# Altium PCB Pathfinder.PcbDoc
Units mil, origin at the board's own origin, x right, y up, seen from the top; angles counter-clockwise.
Board outline 2658.54 x 3055 mil, 2 copper layers (Top Layer, Bottom Layer); 99 components, 52 nets, 252 pads, 164 vias.
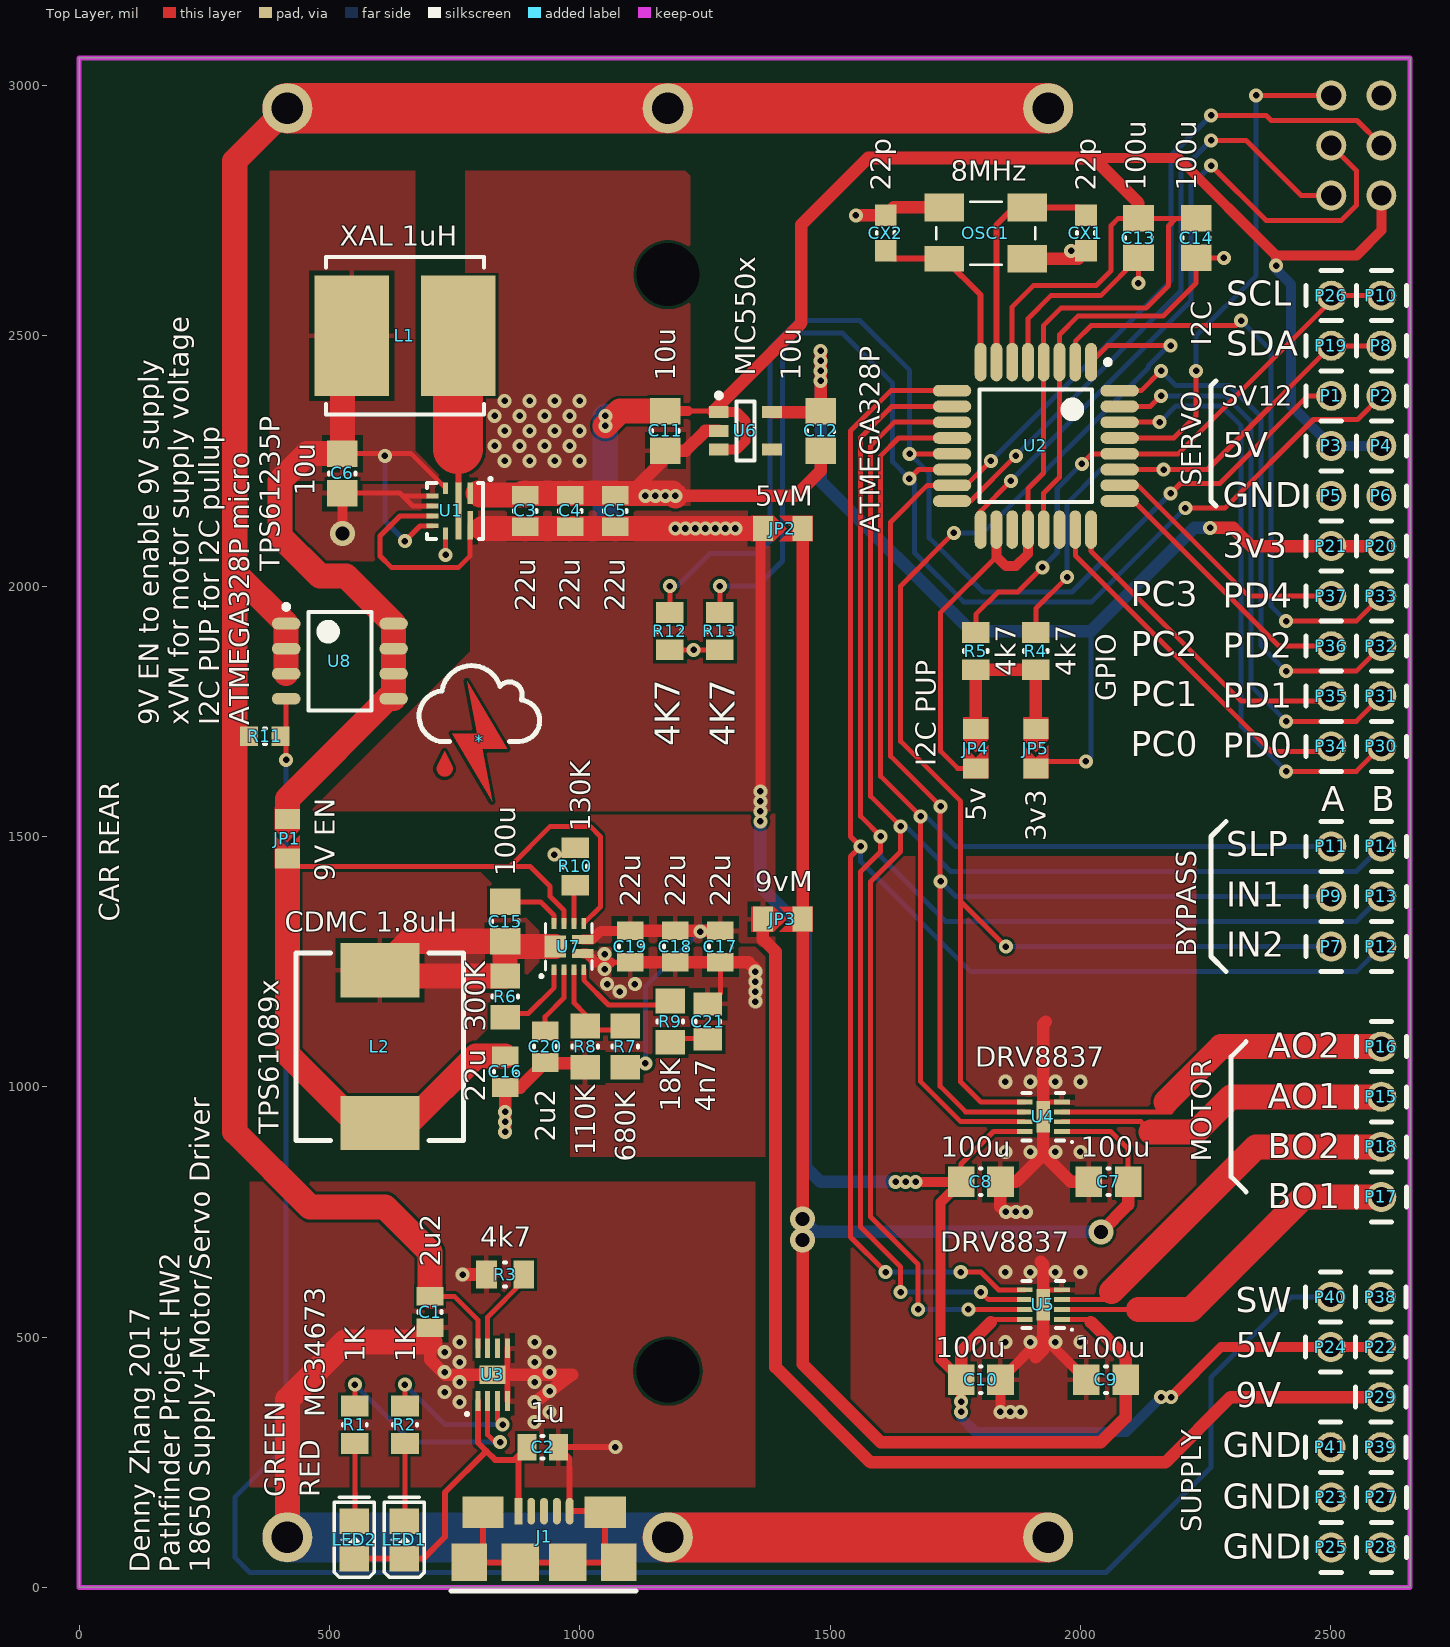
[diagram p0: Top Layer view]
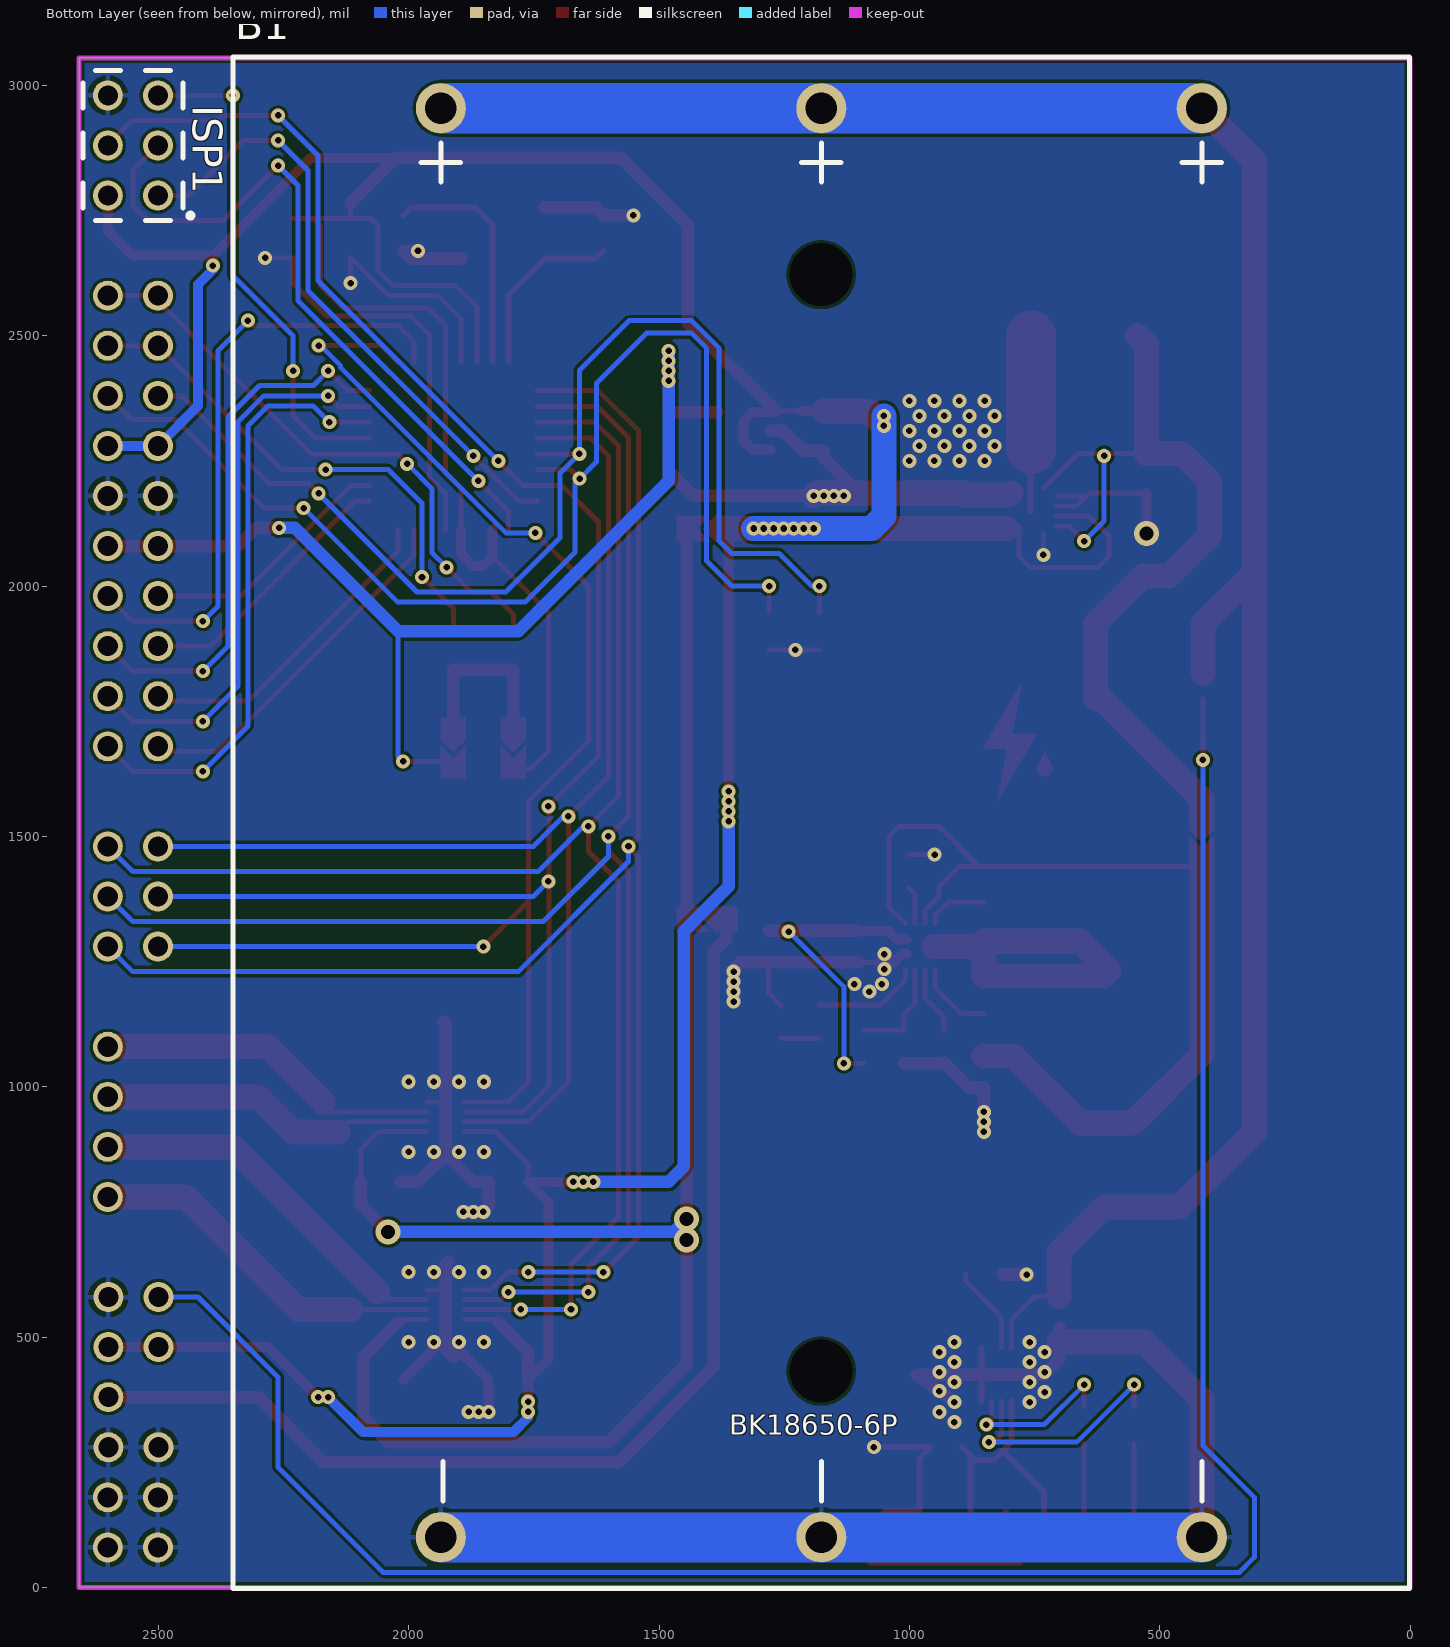
[diagram p1: Bottom Layer view, seen from below]

## Layer stack, top to bottom
Top Solder: solder mask 0.4, Solder Resist, Dk 3.5
Top Layer: signal copper 1.4
Dielectric 1: dielectric 12.6, FR-4, Dk 4.8
Bottom Layer: signal copper 1.4
Bottom Solder: solder mask 0.4, Solder Resist, Dk 3.5

## Board outline
0,0 2658.54,0 2658.54,3055 0,3055

## Design rules (kind name [scope] priority, off if disabled: settings)
Clearance [All] p1: gap=6
PolygonConnect [ispoly vs isvia] p1: connectstyle=Direct reliefconductorwidth=10 reliefentries=4 polygonreliefangle="90 Angle" airgapwidth=10
PolygonConnect PolygonConnect_1 [All] p2: connectstyle=Relief reliefconductorwidth=10 reliefentries=4 polygonreliefangle="90 Angle" airgapwidth=10
RoutingVias [All] p1: holewidth=28 width=50 viastyle="Through Hole" minholewidth=13 minwidth=28 maxholewidth=28 maxwidth=50
SolderMaskExpansion [All] p1: expansion=4
Width [All] p1: maxlimit=100 minlimit=6 preferedwidth=10
30 further rules are at their usual default settings.

## Components (designator, comment, footprint, x,y, rotation, side; value= is the part's Value field where it differs from the comment)
* "Logo" "Zap Cloud" 800,1690 r0 top
B1 "18650 Holder 3Cell" 18650-3Cell 1175.91,1527.17 r270 bottom
C1 "2.2uF" CAPC0805(2012)100_L 701.06,550 r90 top
C2 "1uF" CAPC0805(2012)100_L 926.06,280 r180 top
C3 "22uF" CAPC0805(2012)100_L 891.06,2150 r270 top
C4 "22uF" CAPC0805(2012)100_L 981.06,2150 r270 top
C5 "22uF" CAPC0805(2012)100_L 1071.06,2150 r270 top
C6 "10uF" CAPC0805(2012)145_M 526.06,2225 r90 top
C7 "100nF" CAPC0805(2012)100_M 2056.06,810 r0 top
C8 "100nF" CAPC0805(2012)100_M 1801.06,810 r180 top
C9 "100nF" CAPC0805(2012)100_M 2051.06,415 r0 top
C10 "100nF" CAPC0805(2012)100_M 1801.06,415 r180 top
C11 "10uF" CAPC0805(2012)145_M 1171.06,2310 r90 top
C12 "10uF" CAPC0805(2012)145_M 1481.06,2310 r90 top
C13 "100nF" CAPC0805(2012)100_M 2116.06,2695 r90 top
C14 "100nF" CAPC0805(2012)100_M 2231.06,2695 r90 top
C15 "100nF" CAPC0805(2012)100_M 851.06,1330 r270 top
C16 "22uF" CAPC0805(2012)100_L 851.06,1030 r90 top
C17 "22uF" CAPC0805(2012)100_L 1281.06,1280 r90 top
C18 "22uF" CAPC0805(2012)100_L 1191.06,1280 r90 top
C19 "22uF" CAPC0805(2012)100_L 1101.06,1280 r90 top
C20 "CAP 2.2uF 16V 0805(2012)" CAPC0805(2012)145_L 931.06,1080 r90 top
C21 "4.7nF" CAPC0805(2012)145_N 1256.06,1130 r270 top
CX1 "CAP 22pF 10V 0603(1608)" CAPC0603(1608)100_M 2011.06,2705 r90 top
CX2 "CAP 22pF 10V 0603(1608)" CAPC0603(1608)100_M 1611.06,2705 r270 top
ISP1 "AVRISP" "2x3 100mil Header" 2501.06,2780 r90 bottom
J1 "USB micro B" "USB Micro SMD" 928.82,50 r0 top
JP1 "SolderJumper" bridge 416.06,1500 r270 top
JP2 "SolderJumper" bridge 1401.06,2115 r0 top
JP3 "SolderJumper" bridge 1401.06,1335 r0 top
JP4 "SolderJumper" bridge 1791.06,1680 r270 top
JP5 "SolderJumper" bridge 1911.06,1680 r270 top
L1 "Inductor" XAL7030-102ME 651.06,2500 r0 top
L2 "Inductor" CDMC8D28NP-1R8MC 601.06,1080 r90 top
LED1 "LED2" LED0805 650,95 r90 top
LED2 "LED2" LED0805 550,95 r90 top
OSC1 "ABM3B" ABM3B 1811.06,2705 r180 top
P1 "SV1" "Pin 100mil" 2501.06,2380 r0 top
P2 "SV2" "Pin 100mil" 2601.06,2380 r0 top
P3 "5V" "Pin 100mil" 2501.06,2280 r0 top
P4 "5V" "Pin 100mil" 2601.06,2280 r0 top
P5 "GND" "Pin 100mil" 2501.06,2180 r0 top
P6 "GND" "Pin 100mil" 2601.06,2180 r0 top
P7 "Ain2" "Pin 100mil" 2501.06,1280 r180 top
P8 "SDA" "Pin 100mil" 2601.06,2480 r180 top
P9 "Ain1" "Pin 100mil" 2501.06,1380 r180 top
P10 "SCL" "Pin 100mil" 2601.06,2580 r180 top
P11 "ASLP" "Pin 100mil" 2501.06,1480 r180 top
P12 "Bin2" "Pin 100mil" 2601.06,1280 r180 top
P13 "Bin1" "Pin 100mil" 2601.06,1380 r180 top
P14 "BSLP" "Pin 100mil" 2601.06,1480 r180 top
P15 "AO1" "Pin 100mil" 2601.06,980 r180 top
P16 "AO2" "Pin 100mil" 2601.06,1080 r180 top
P17 "BO1" "Pin 100mil" 2601.06,780 r180 top
P18 "BO2" "Pin 100mil" 2601.06,880 r180 top
P19 "SDA" "Pin 100mil" 2501.06,2480 r180 top
P20 "3v3" "Pin 100mil" 2601.06,2080 r180 top
P21 "3v3" "Pin 100mil" 2501.06,2080 r180 top
P22 "5V" "Pin 100mil" 2600,480 r180 top
P23 "GND" "Pin 100mil" 2501.06,180 r180 top
P24 "5V" "Pin 100mil" 2500,480 r180 top
P25 "GND" "Pin 100mil" 2501.06,80 r180 top
P26 "SCL" "Pin 100mil" 2501.06,2580 r180 top
P27 "GND" "Pin 100mil" 2601.06,180 r180 top
P28 "GND" "Pin 100mil" 2601.06,80 r180 top
P29 "9V" "Pin 100mil" 2600,380 r180 top
P30 "PD0" "Pin 100mil" 2601.06,1680 r180 top
P31 "PD1" "Pin 100mil" 2601.06,1780 r180 top
P32 "PD2" "Pin 100mil" 2601.06,1880 r180 top
P33 "PD4" "Pin 100mil" 2601.06,1980 r180 top
P34 "PC0" "Pin 100mil" 2501.06,1680 r180 top
P35 "PC1" "Pin 100mil" 2501.06,1780 r180 top
P36 "PC2" "Pin 100mil" 2501.06,1880 r180 top
P37 "PC3" "Pin 100mil" 2501.06,1980 r180 top
P38 "SDA" "Pin 100mil" 2600,580 r180 top
P39 "GND" "Pin 100mil" 2600,280 r180 top
P40 "SDA" "Pin 100mil" 2500,580 r180 top
P41 "GND" "Pin 100mil" 2500,280 r180 top
R1 "1K" RESC0805(2012)_N 551.06,325 r270 top
R2 "1K" RESC0805(2012)_N 651.06,325 r270 top
R3 "4K7" RESC0805(2012)_N 851.06,625 r0 top
R4 "4K7" RESC0805(2012)_N 1911.06,1870 r270 top
R5 "4K7" RESC0805(2012)_N 1791.06,1870 r270 top
R6 "300K" RESC0805(2012)_M 851.06,1180 r90 top
R7 "680K" RESC0805(2012)_M 1091.06,1080 r270 top
R8 "110K" RESC0805(2012)_M 1011.06,1080 r90 top
R9 "18K" RESC0805(2012)_M 1181.06,1130 r90 top
R10 "130K" RESC0805(2012)_N 991.06,1440 r270 top
R11 "10K" RESC0603(1608)_N 371.06,1700 r180 top
R12 "4K7" RESC0805(2012)_N 1180,1910 r90 top
R13 "4K7" RESC0805(2012)_N 1280,1910 r90 top
U1 "TPS61235P" VQFN-HR-TPS61235PRWLR 751.06,2150 r270 top
U2 "ATmega328P-ANR" 32A_M 1911.06,2280 r270 top
U3 "MC34673" "UDFN-8 2 x 3 x 0.65" 826.06,425 r90 top
U4 "DRV8837" WSON-8 1926.06,940 r180 top
U5 "DRV8837" WSON-8 1926.06,565 r180 top
U6 "MIC550x" SOT-23-5 1331.06,2310 r0 top
U7 "TPS61089x" "VQFN-11 2 x 2.5" 978.62,1280 r90 top
U8 "P-MOS" SOIC-8-MOSFET 521.06,1850 r0 top

## Footprints (in the part's own frame and the unit in brackets; to place one, negate y for a bottom-side part, rotate by r counter-clockwise, add the part's x,y. Pads: shape width x height; smd on the part's side, far side on the other; paste and mask are expansions set on the pad)
"2x3 100mil Header" [mil]
  round 60 hole 40: 1(0,0) 2(0,100) 3(100,0) 4(100,100) 5(200,0) 6(200,100)
  silkscreen extent -50,-70 250,150
32A_M [mm] "Thin QFP, 32-Leads, Body 7x7mm, Pitch 0.8mm, IPC Low Density"
  oval 1.95x0.6 smd: 1(-4.25,2.8) 2(-4.25,2) 3(-4.25,1.2) 4(-4.25,0.4) 5(-4.25,-0.4) 6(-4.25,-1.2) 7(-4.25,-2) 8(-4.25,-2.8) 17(4.25,-2.8) 18(4.25,-2) 19(4.25,-1.2) 20(4.25,-0.4) 21(4.25,0.4) 22(4.25,1.2) 23(4.25,2) 24(4.25,2.8)
  oval 0.6x1.95 smd: 9(-2.8,-4.25) 10(-2,-4.25) 11(-1.2,-4.25) 12(-0.4,-4.25) 13(0.4,-4.25) 14(1.2,-4.25) 15(2,-4.25) 16(2.8,-4.25) 25(2.8,4.25) 26(2,4.25) 27(1.2,4.25) 28(0.4,4.25) 29(-0.4,4.25) 30(-1.2,4.25) 31(-2,4.25) 32(-2.8,4.25)
  silkscreen extent -4.37,-2.85 2.85,3.78, body extent -3.5,-3.5 3.5,3.5, height 1.2
18650-3Cell [mm] "BK-18650-PC6"
  round 2.54 hole 1.6: 1(-36.25,19.3) 2(36.25,19.3) 3(-36.25,0) 4(36.25,0) 5(-36.25,-19.3) 6(36.25,-19.3)
  silkscreen extent -38.85,-29.85 38.85,29.84
ABM3B [mm]
  rect 2x1.4 smd: GND(-2.1,1.3) GND(2.1,-1.3) OSC1(-2.1,-1.3)
  rect 2x1.3 smd: OSC2(2.1,1.3)
  silkscreen extent -2.5,-1.6 2.5,1.6, body extent -2.5,-1.6 2.5,1.6, height 1.1
bridge [mil]
  rect 40x50 smd: 1(-35,0) 2(44,0)
  Top Layer region: -2,-25 23,0 -2,25 64,25 64,-25
  Top Layer region: -58,-25 -13,-25 12,0 -13,25 -58,25
CAPC0603(1608)100_M [mm] "Chip Capacitor, Body 1.6x0.8mm, Height 1.0mm, IPC Low Density"
  rect 1.1x1.1 smd: 1(-0.9,0) 2(0.9,0)
  silkscreen extent -0.05,-0.45 0.05,0.45, body extent -0.87,-0.47 0.88,0.48, height 1
CAPC0805(2012)100_L [mm] "Chip Capacitor, Body 2.0x1.2mm, Height 1.0mm, IPC High Density"
  rect 0.95x1.35 smd: 1(-0.8,0) 2(0.8,0)
  silkscreen extent -0.05,-0.58 0.05,0.58, body extent -1.1,-0.72 1.1,0.72, height 1
CAPC0805(2012)100_M [mm] "Chip Capacitor, Body 2.0x1.2mm, Height 1.0mm, IPC Low Density"
  rect 1.35x1.55 smd: 1(-1,0) 2(1,0)
  silkscreen extent -0.05,-0.67 0.05,0.67, body extent -1.1,-0.72 1.1,0.72, height 1
CAPC0805(2012)145_L [mm] "Chip Capacitor, Body 2.0x1.2mm, Height 1.45mm, IPC High Density"
  rect 0.95x1.35 smd: 1(-0.8,0) 2(0.8,0)
  silkscreen extent -0.05,-0.58 0.05,0.58, body extent -1.1,-0.72 1.1,0.72, height 1.45
CAPC0805(2012)145_M [mm] "Chip Capacitor, Body 2.0x1.2mm, Height 1.45mm, IPC Low Density"
  rect 1.35x1.55 smd: 1(-1,0) 2(1,0)
  silkscreen extent -0.05,-0.67 0.05,0.67, body extent -1.1,-0.72 1.1,0.72, height 1.45
CAPC0805(2012)145_N [mm] "Chip Capacitor, Body 2.0x1.2mm, Height 1.45mm, IPC Medium Density"
  rect 1.15x1.45 smd: 1(-0.9,0) 2(0.9,0)
  silkscreen extent -0.05,-0.62 0.05,0.63, body extent -1.1,-0.72 1.1,0.73, height 1.45
CDMC8D28NP-1R8MC [mm] "CDMC8D28NP-1R8MC inductor"
  rect 2.75x4 smd: 1(-3.875,0) 2(3.875,0)
  silkscreen extent -4.75,-4.25 4.75,4.25, body extent -4.75,-4.25 4.75,4.25, height 3
LED0805 [mm]
  rect 1.3x1.5 smd: 1(-0.95,0) 2(0.95,0)
  silkscreen extent -1.91,-1.02 2.16,1.02, body extent -1.03,-0.45 1.03,0.46, height 0.85
"Pin 100mil" [mil]
  round 60 hole 40.16: 0(0,0)
  silkscreen extent -50,-50 50,50
RESC0603(1608)_N [mm] "Chip Resistor, Body 1.6x0.8mm, IPC Medium Density"
  rect 0.9x1 smd: 1(-0.8,0) 2(0.8,0)
  silkscreen extent -0.05,-0.4 0.05,0.4, body extent -0.85,-0.47 0.85,0.47, height 0.6
RESC0805(2012)_M [mm] "Chip Resistor, Body 2.0x1.3mm, IPC Low Density"
  rect 1.25x1.5 smd: 1(-1.05,0) 2(1.05,0)
  silkscreen extent -0.05,-0.65 0.05,0.65, body extent -1.1,-0.67 1.1,0.67, height 0.7
RESC0805(2012)_N [mm] "Chip Resistor, Body 2.0x1.3mm, IPC Medium Density"
  rect 1.05x1.4 smd: 1(-0.95,0) 2(0.95,0)
  silkscreen extent -0.05,-0.6 0.05,0.6, body extent -1.1,-0.67 1.1,0.68, height 0.7
SOIC-8-MOSFET [mm] "SOIC, 8-Leads, Body 4.90x3.90mm, Pitch 1.27mm, IPC Medium Density"
  oval 1.45x0.6 smd: D(2.725,-1.905) D(2.725,-0.635) D(2.725,0.635) D(2.725,1.905) G(-2.725,-1.905) S(-2.725,-0.635) S(-2.725,0.635) S(-2.725,1.905)
  silkscreen extent -2.85,-2.5 1.6,2.88, body extent -2,-2.5 2,2.5, height 1.75
SOT-23-5 [mm] "SOT23, 5-Leads, Body 2.90x2.80mm, Pitch 0.95mm, IPC Medium Density"
  rect 1x0.6 smd: 1(-1.35,0.95) 2(-1.35,0) 3(-1.35,-0.95) 4(1.35,-0.95) 5(1.35,0.95)
  silkscreen extent -1.47,-1.5 0.45,1.92, body extent -0.85,-1.5 0.85,1.5, height 1.45
"UDFN-8 2 x 3 x 0.65" [mm] "SON, 8-Leads, Body 2.00x3.00mm, Pitch 0.50mm, Thermal Pad 1.33x0.93mm, IPC Medium Density"
  rect 1x0.25 smd: 1(-1.34,0.75) 2(-1.34,0.25) 3(-1.34,-0.25) 4(-1.34,-0.75) 5(1.34,-0.75) 6(1.34,-0.25) 7(1.34,0.25) 8(1.34,0.75)
  rect 0.93x1.33 smd: 9(0,0)
  silkscreen extent -2.05,1.25 -1.95,1.35, body extent -1.5,-1 1.5,1, height 0.65
"USB Micro SMD" [mm] "Amphenol FCI 10118192-0001LF"
  rect 1.8x1.9 smd: 0(-3.8,0) 0(3.8,0)
  rect 2.1x1.6 smd: 0(-3.1,2.55) 0(3.1,2.55)
  rect 1.9x1.9 smd: 0(-1.2,0) 0(1.2,0)
  rect 0.4x1.35 smd: 1(-1.3,2.6)
  oval 0.4x1.35 smd: 2(-0.65,2.6) 3(0,2.6) 4(0.65,2.6) 5(1.3,2.6)
  silkscreen extent -4.72,-1.45 4.67,-1.45, body extent -4.1,-2.58 4.1,2.85, height 3
"VQFN-11 2 x 2.5" [mm] "tps61089x"
  rect 0.55x0.25 smd mask+0.05: 1(-1.175,0.75) 2(-1.175,0.25) 3(-1.175,-0.25) 4(-1.175,-0.75) 7(1.175,-0.75) 8(1.175,-0.25) 9(1.175,0.25) 10(1.175,0.75)
  rect 0.45x1.1 smd mask-0.05: 5(-0.35,-0.7) 6(0.35,-0.7)
  rect 1.1x1.1 smd mask-0.05: 11(0,0.7)
  silkscreen extent -1.55,-1.17 1.17,1.45, body extent -1.25,-1 1.25,1, height 1
VQFN-HR-TPS61235PRWLR [mm]
  rect 1.1x0.3 smd: 1(-0.9,0.77)
  rect 2.9x0.3 smd: 2(0,0.17)
  rect 0.6x0.25 smd: 3(-1.15,-0.475) 8(1.15,-0.475)
  rect 0.25x0.6 smd: 4(-0.75,-1.15) 5(-0.25,-1.15) 6(0.25,-1.15) 7(0.75,-1.15)
  rect 1.45x0.3 smd: 9(0.725,0.77)
  silkscreen extent -1.67,-1.43 1.43,1.85, body extent -1.25,-1.25 1.25,1.25, height 1
WSON-8 [mm] "SON, 8-Leads, Body 2.00x2.00mm, Pitch 0.50mm, Thermal Pad 1.60x0.69mm, IPC Medium Density"
  rect 0.8x0.25 smd: 1(-0.945,0.75) 2(-0.945,0.25) 3(-0.945,-0.25) 4(-0.945,-0.75) 5(0.945,-0.75) 6(0.945,-0.25) 7(0.945,0.25) 8(0.945,0.75)
  rect 0.69x1.6 smd: 9(0,0)
  silkscreen extent -1.5,-1.2 1.05,1.32, body extent -1.05,-1.05 1.05,1.05, height 0.8
XAL7030-102ME [mm] "Precision Wire Wound Inductor, 2-Leads, Body 7.50x7.50mm, IPC Medium Density"
  rect 3.8x6.1 smd: 1(-2.7,0) 2(2.7,0)
  silkscreen extent -4,-4 4,4, body extent -4,-4 4,4, height 3.1
"Zap Cloud" [mil]
  Top Layer region: -70,-20 -55,-49 -54,-53 -54,-57 -55,-60 -57,-64 -61,-68 -65,-70 -70,-71 -75,-70 -79,-68 -83,-64 -85,-60 -86,-57 -86,-53 -85,-49
  Top Layer region: -25,120 55,-15 5,-15 25,-120 -55,15 -5,15
  silkscreen extent -121,0 120,151

## Part data
B1: library part BK18650-3Cell, "BK-18650-PC6"
C1: library part CMP-1036-04832-1, "CAP 2.2uF 16V ±10% 0805 (2012 Metric) Thickness 1mm SMD"
C2: library part CMP-1036-04749-1, "CAP 1uF 16V ±20% 0805 (2012 Metric) Thickness 1mm SMD"
C3 C4 C5 C16 C17 C18 C19: library part CMP-1036-04944-1, "CAP 22uF 10V ±20% 0805 (2012 Metric) Thickness 1mm SMD"
C6 C11 C12: library part CMP-1036-04926-1, "CAP 10uF 10V -20% to +80% 0805 (2012 Metric) Thickness 1.45mm SMD"
C7 C8 C9 C10 C13 C14 C15: library part CMP-1036-04394-1, "CAP 100nF 10V ±10% 0805 (2012 Metric) Thickness 1mm SMD"
C20: library part CMP-1036-04831-1, "CAP 2.2uF 16V ±10% 0805 (2012 Metric) Thickness 1.45mm SMD"
C21: library part CMP-1036-03558-1, "CAP 4.7nF 16V ±1% 0805 (2012 Metric) Thickness 1.45mm SMD"
CX1 CX2: library part CMP-1035-00798-1, "CAP 22pF 10V ±0.5pF 0603 (1608 Metric) Thickness 1mm SMD"
ISP1: "AVR ISP connection"
J1: library part Micro-USB, "Micro USB connector"
JP1 JP2 JP3 JP4 JP5: "Solder Configuration Jumper"
L1 L2: "Generic Inductor"
LED1 LED2: "Typical RED, GREEN, YELLOW, AMBER GaAs LED"
P1 P2 P3 P4 P5 P6 P7 P8 P9 P10 P11 P12 P13 P14 P15 P16 P17 P18 P19 P20 P21 P22 P23 P24 P25 P26 P27 P28 P29 P30 P31 P32 P33 P34 P35 P36 P37 P38 P39 P40 P41: library part 1-Pin
R1 R2: library part CMP-1013-00074-1, "1K 0.125W 5% 0805 (2012 Metric)  SMD"
R3 R4 R5 R12 R13: library part CMP-1013-00090-1, "4K7 0.125W 5% 0805 (2012 Metric)  SMD"
R6: library part CMP-1013-00133-1, "300K 0.125W 5% 0805 (2012 Metric)  SMD"
R7: library part CMP-1013-00142-1, "680K 0.125W 5% 0805 (2012 Metric)  SMD"
R8: library part CMP-1013-00123-1, "110K 0.125W 5% 0805 (2012 Metric)  SMD"
R9: library part CMP-1013-00104-1, "18K 0.125W 5% 0805 (2012 Metric)  SMD"
R10: library part CMP-1013-00125-1, "130K 0.125W 5% 0805 (2012 Metric)  SMD"
R11: library part CMP-1012-00098-1, "10K 0.1W 5% 0603 (1608 Metric)  SMD"
U1: "8-A Valley Current Synchronous Boost Converter"
U2: library part CMP-0095-00621-1, "8-bit AVR Microcontroller, 32KB Flash, 1KB EEPROM, 2KB SRAM, 32-pin TQFP, Industrial Grade (-40°C to 105°C), Reel"
U3: "1.2A Charger  for Single-cell Li-Ion Batteries"
U4 U5: "Low-Voltage H-Bridge Driver"
U6: "MIC550x Regulator"
U7: "12.6-V, 7-A Fully-Integrated Synchronous Boost Converter"
U8: library part SI4403CDY-T1, "SI4403CDY-T1"

## Free pads (board coordinates)
  round 0 hole 126: 0(1176.26,432.09) 0(1176.26,2622.05)

## Via types
v1: diameter 28, hole 13, Top Layer to Bottom Layer, 160 vias
v2: diameter 50, hole 28, Top Layer to Bottom Layer, 4 vias

## Nets (pads, with @x,y where several pads share a name; then routed paths per layer and width w, separated by ;. In a path a pad name is that pad's centre, name@x,y a point inside that pad or via, vN(x,y) a via of type N, cw(c..) or ccw(c..) an arc to the next point about the centre after c; other vN are vias at no path point)
3V3: C12.2 JP5.2 P20.0 P21.0 U6.5 | length 2192.9
  Top Layer w10: JP5.2 1925.06,1650 v1(2011.06,1650)
  Top Layer w25: U6.5 1479.09,2347.4 C12.2 v1(1481.06,2410) v1(1481.06,2430) v1(1481.06,2450) v1(1481.06,2470) ; v1(2258.94,2116.14) 2304.92,2116.14 2341.06,2080 P21.0 P20.0
  Bottom Layer w10: v1(2011.06,1650) 2021.06,1660 2021.06,1910
  Bottom Layer w25: v1(1481.06,2470) v1(1481.06,2450) v1(1481.06,2430) v1(1481.06,2410) 1481.06,2210 1781.06,1910 2021.06,1910 2227.2,2116.14 v1(2258.94,2116.14)
5V: C3.2 C4.2 C5.2 C8.2 C10.2 C11.2 C13.2 C14.2 ISP1.2 JP2.1 JP4.2 P3.0 P4.0 P22.0 P24.0 U1.6 U1.9 U2.4 U2.6 U2.18 U2.20 U4.8 U5.8 U6.1 U6.3 | length 10045.9
  Top Layer w10: U1.6 641.22,2140.16 601.06,2100 601.06,2060 623.7,2037.36 758.43,2037.36 781.38,2060.32 U1.9 ; 1216.61,2349.37 U6.1@1266.77,2349.37 ; C8.2 1761.69,845.63 1826.54,910.47 U4.8 ; JP4.2 1755.06,1636 1721.06,1670 1721.06,1947.48 1832.32,2058.74 ; 1821.06,530 1826.54,535.47 U5.8 ; U2.6 1863.82,2557.76 1906.06,2600 2031.06,2600 2061.06,2630 2061.06,2720 2075.43,2734.37 C13.2 ; U2.20 1895.32,2194.25 1926.81,2225.75 U2.4 1926.81,2520.75 1961.06,2555 2131.06,2555 2176.06,2600 2176.06,2719.37 2191.06,2734.37 ; 2116.06,2765 C13.2 ; C14.2 2191.06,2734.37 ; C13.2 2191.06,2734.37
  Top Layer w20: 1061.69,2349.37 1080.43,2349.37 ; C11.2 1216.61,2349.37 ; U6.1@1266.77,2349.37 1275.94,2349.37 U6.1 1313.66,2347.4 1331.06,2330 1331.06,2290 1313.66,2272.6 U6.3 ; v1(1361.06,1590) 1361.06,2110 JP2.1 ; v1(1631.06,810) v1(1651.06,810) v1(1671.06,810) C8.2 1721.06,769.37 1721.06,455.63 C10.2 v1(1761.69,371.02) v1(1761.69,350.63) ; U2.18 1832.32,2058.74 1851.06,2040 1871.06,2040 1895.32,2064.25 U2.20 ; 2026.06,2855 2196.06,2855 2391.06,2660 ; v1(2161.06,380) v1(2181.06,380) 2281.06,480 P24.0 P22.0 ; v1(2391.06,2640) 2391.06,2660 ; ISP1.2 2601.06,2710 2551.06,2660 2391.06,2660
  Top Layer w25: U6.1@1266.77,2349.37 1442.99,2525.59 1442.99,2721.93 1576.06,2855 2026.06,2855 2116.06,2765 ; JP2.1@1350.57,2118.5 JP2.1@1357.06,2125 ; C10.2 1761.69,470.63 1821.06,530
  Top Layer w50: 806.06,2115 v1(1191.06,2115) v1(1211.06,2115) v1(1231.06,2115) v1(1251.06,2115) v1(1271.06,2115) v1(1291.06,2115) v1(1311.06,2115) JP2.1 ; v1(1051.06,2320) 1080.43,2349.37 C11.2
  Bottom Layer w20: v1(1361.06,1530) v1(1361.06,1550) v1(1361.06,1570) v1(1361.06,1590) ; v1(1761.69,371.02) v1(1761.69,350.63) 1761.69,339.37 1791.06,310 2091.06,310 v1(2161.06,380) v1(2181.06,380) ; v1(2391.06,2640) 2391.06,2632.43 2421.06,2602.43 2421.06,2360 P3.0 P4.0
  Bottom Layer w25: v1(1361.06,1530) 1361.06,1400 1451.06,1310 1451.06,840 1481.06,810 v1(1631.06,810)
  Bottom Layer w50: v1(1051.06,2340) v1(1051.06,2320) 1051.06,2140 1076.06,2115 v1(1191.06,2115) v1(1211.06,2115) v1(1231.06,2115) v1(1251.06,2115) v1(1271.06,2115) v1(1291.06,2115) v1(1311.06,2115)
9V: C17.2 C18.2 C19.2 JP3.1 P29.0 R7.2 U7.6 | length 2879.2
  Top Layer w10: R7.2@1091.06,1046.54 v1(1131.06,1046.54)
  Top Layer w20: U7.6 1024.54,1293.78 1042.26,1311.5 C19.2
  Top Layer w25: C19.2 C18.2 C17.2 ; JP3.1 1366.06,1295 1391.06,1270 1391.06,440 1581.06,250 2170,250 2300,380 P29.0 P29.0@2601.06,380
  Bottom Layer w10: v1(1131.06,1046.54) 1131.06,1200 v1(1241.06,1310)
A1: P15.0 U4.2 | length 675.1
  Top Layer w10: U4.2 2120.91,930.16 2141.06,910
  Top Layer w50: 2141.06,910 2231.06,910 2301.06,980 P15.0
A2: P16.0 U4.3 | length 693.5
  Top Layer w10: U4.3 2181.22,949.84
  Top Layer w50: 2171.06,970 2281.06,1080 P16.0
ANSLEEP: P11.0 U2.12 U4.7 | length 2526.2
  Top Layer w10: U2.12 1636.81,2295.75 1601.06,2260 1601.06,1620 v1(1681.06,1540) 1681.06,1010.16 1761.06,930.16 U4.7
  Bottom Layer w10: v1(1681.06,1540) 1691.06,1540 1751.06,1480 P11.0
APWM1: ISP1.4 P9.0 U2.15 U4.6 | length 3639.8
  Top Layer w10: v1(1821.06,2250) 1772.32,2201.26 U2.15 1694.45,2201.26 1621.06,2127.87 1621.06,1660 v1(1721.06,1560) 1720.06,1559 1720.06,1000.84 1771.06,949.84 U4.6 ; v1(2261.06,2940) 2371.06,2940 2381.06,2930 2552.56,2930 2601.06,2881.5 ISP1.4
  Bottom Layer w10: v1(1721.06,1410) 1751.06,1380 P9.0 ; v1(1821.06,2250) 2181.06,2610 2181.06,2860 v1(2261.06,2940)
APWM2: P7.0 U2.1 U4.5 | length 2882.4
  Top Layer w10: v1(1747.13,2106.3) 1641.06,2000.24 1641.06,1690 1761.06,1570 1761.06,1370 ; v1(1851.06,1280) 1761.06,1370 ; U4.5 1801.06,969.53 1761.06,1009.53 1761.06,1370 ; U2.1 2054.29,2480.32 v1(2180.2,2480.32)
  Bottom Layer w10: v1(1747.13,2106.3) 1806.18,2106.3 2136.06,2436.18 2136.06,2440.36 2176.02,2480.32 v1(2180.2,2480.32) ; v1@1843.69,1280 v1(1851.06,1280) P7.0
B1: P17.0 U5.2 | length 730.9
  Top Layer w10: U5.2 2116.51,555.16
  Top Layer w50: 2116.51,555.16 2221.06,555.16 2445.91,780 P17.0
B2: P18.0 U5.3 | length 764.2
  Top Layer w10: U5.3 2045.91,574.84 2062.22,591.16
  Top Layer w50: 2062.22,591.16 2351.06,880 P18.0
BNSLEEP: P14.0 U2.11 U5.7 | length 3227
  Top Layer w10: v1(1675.91,555.16) 1675.91,645.16 1581.06,740 1581.06,1410 1641.06,1470 v1(1641.06,1520) 1581.06,1580 1581.06,2280 1628.31,2327.24 U2.11 ; v1(1776.22,555.16) U5.7
  Bottom Layer w10: v1(1641.06,1520) 1651.06,1520 1741.06,1430 2551.06,1430 P14.0 ; v1(1675.91,555.16) v1(1776.22,555.16)
BPWM1: P13.0 U2.10 U5.6 | length 3349.9
  Top Layer w10: v1(1641.06,590) 1641.06,640 1561.06,720 1561.06,1430 1601.06,1470 v1(1601.06,1500) 1561.06,1540 1561.06,2296.63 1623.17,2358.74 U2.10 ; v1(1801.06,590) 1816.22,574.84 U5.6
  Bottom Layer w10: v1(1601.06,1500) 1601.06,1460 1731.06,1330 2551.06,1330 P13.0 ; v1(1641.06,590) v1(1801.06,590)
BPWM2: P12.0 U2.9 U5.5 | length 3435.8
  Top Layer w10: v1(1611.06,630) 1541.06,700 1541.06,1460 v1(1561.06,1480) 1541.06,1500 1541.06,2310 1621.3,2390.24 U2.9 ; v1(1761.06,630) 1801.06,630 1836.54,594.53 U5.5
  Bottom Layer w10: v1(1561.06,1480) 1561.06,1450 1781.06,1230 2551.06,1230 P12.0 ; v1(1611.06,630) v1(1761.06,630)
GND: B1.2 B1.4 B1.6 C1.1 C2.1 C3.1 C4.1 C5.1 C6.1 C7.1 C8.1 C9.1 C10.1 C11.1 C12.1 C13.1 C14.1 C16.1 C17.1 C18.1 C19.1 C20.1 C21.1 CX1.1 CX2.1 ISP1.6 J1.0 J1.5 OSC1.GND P5.0 P6.0 P23.0 P25.0 P27.0 P28.0 P38.0 P39.0 P41.0 R3.1 R8.1 R10.1 R12.1 R13.1 U1.1 U1.4 U1.5 U1.8 U2.3 U2.5 U2.21 U3.4 U3.5 U3.9 U4.4 U4.9 U5.4 U5.9 U6.2 U7.5 | length 10218.2
  Top Layer w10: C6.1 641.06,2185.63 647.17,2179.53 ; U1.5 666.85,2159.84 647.17,2179.53 ; U1.4 647.17,2179.53 ; v1@730,2060 v1(732.36,2062.36) U1.8 ; U1.1 797.28,2185.43 816.06,2185.43 887.13,2185.43 C3.1 C4.1 C4.1@1001.06,2181.5 ; v1(949.53,1463.46) R10.1@1001.06,1463.46 ; C4.1@1001.06,2170 1001.06,2180 C4.1@1001.06,2181.5 ; v1@1044.84,1266.22 1062.56,1248.5 C19.1 ; R12.1 v1(1227.6,1872.6) R13.1 ; v1(1191.06,2180) v1(1171.06,2180) v1(1151.06,2180) v1(1131.06,2180) 1129.57,2181.5 C5.1 C4.1@1001.06,2181.5 ; C21.1@1256.06,1161.5 1281.06,1186.5 C17.1 ; U2.5 1895.32,2534.25 1941.06,2580 2040.43,2580 C13.1 v1(2116.06,2605) v1@2121.06,2600 ; U5.9@1926.54,594.53 U5.4 ; U2.21 1926.81,2185.75 1958.31,2217.24 U2.3 1958.31,2502.24 1995.06,2539 2165.06,2539 2231.06,2605 C14.1 v1(2286.69,2655.63) v1@2291.06,2660 ; U4.9@1931.54,969.53 U4.4
  Top Layer w12: J1.0@806.77,150.39 806.77,77.56 779.21,50 881.57,50 976.06,50 1078.43,50 1050.87,77.56 1050.87,150.39 1048.9,152.36 J1.5 980,257.56 C2.1 v1(1071.06,280) ; U3.4 855.59,425 U3.5
  Top Layer w20: C6.1 v2(526.06,2105) v2@531.06,2100 ; U7.5 1014.04,1266.22 1029.07,1251.19 1029.07,1248.5 1062.56,1248.5 ; v1(1880.43,350.63) v1(1860.43,350.63) v1(1840.43,350.63) C10.1 1926.06,500.63 C9.1
  Top Layer w25: C1.1 701.06,490 701.06,455 731.06,425 U3.9 855.59,425 985,425 v1(940,392) 934.28,387.8 v1(910,370) ; v1(766.06,625) R3.1 ; 816.06,2185.43 820,2181.5 821.5,2180 1001.06,2180 v1(1131.06,2180) v1@1136.5,2185.43 ; v1(851.06,910) v1(851.06,930) v1(851.06,950) C16.1 881.06,998.5 C20.1 933.03,1046.54 R8.1@1011.06,1046.54 ; C19.1 C18.1 C17.1 1337.56,1248.5 1351.06,1235 v1(1351.06,1230) v1(1351.06,1210) v1(1351.06,1190) v1(1351.06,1170) ; 1101.06,2185.43 1171.06,2255.43 C11.1 1211.69,2270.63 1251.06,2310 U6.2 ; v1(1191.06,2180) 1431.06,2180 1481.06,2230 C12.1 ; v1@1551.06,2740 v1(1551.5,2740.43) CX2.1 1626.81,2756.18 OSC1.GND@1728.39,2756.18 ; v1(1891.06,750) v1(1871.06,750) v1(1851.06,750) 1840.43,760.63 C8.1 1871.06,810 1926.06,865 ; OSC1.GND@1893.74,2653.82 1995.31,2653.82 CX1.1 v1(1981.5,2669.57) v1@1981.06,2670 ; 1911.06,460 1926.06,475 1926.06,500.63 U5.9 1926.06,645 1921.06,650 ; 1931.06,1130 1926.06,1125 U4.9 1926.06,865 ; C7.1 1981.06,810 1926.06,865
  Top Layer w50: B1.2 416.06,375 531.06,490 701.06,490 ; 797.28,2185.43 801.22,2181.5 820,2181.5 C3.1 ; C3.1@887.13,2185.43 1101.06,2185.43 1136.5,2185.43 1185.63,2185.43 v1(1191.06,2180)
  Top Layer w100: B1.4 B1.6
  Bottom Layer w100: B1.2 B1.4 B1.6
  other v1: 910,330 940,350 760,370 730,390 760,410 910,410 730,430 940,430 760,450 910,450 730,470 940,470 760,490 910,490 1850,490 1900,490 1950,490 2000,490 1850,630 1900,630 1950,630 2000,630 1850,870 1900,870 1950,870 2000,870 1850,1010 1900,1010 1950,1010 2000,1010 1080,1190 1055,1205 1110,1205 1050,1235 1050,1265 850,2250 900,2250 950,2250 1000,2250 830,2280 880,2280 930,2280 980,2280 850,2310 900,2310 950,2310 1000,2310 830,2340 880,2340 930,2340 980,2340 850,2370 900,2370 950,2370 1000,2370
MISO: ISP1.1 U2.16 | length 1241.8
  Top Layer w10: U2.16 1780.83,2169.76 v1(1871.06,2260) ; v1(2261.06,2890) 2331.06,2890 2441.06,2780 ISP1.1
  Bottom Layer w10: v1(1871.06,2260) 2201.06,2590 2201.06,2830 v1(2261.06,2890)
NetC15_1: C15.1 U7.10 | length 125.1
  Top Layer w10: C15.1 921.69,1369.37 949.09,1341.97 U7.10
NetC15_2: C15.2 L2.2 R6.2 U7.11 | length 702.4
  Top Layer w50: U7.11 861.69,1280 C15.2 ; C15.2 R6.2 612.28,1221.34 L2.2 659.13,1290.63 C15.2
NetC16_2: C16.2 JP1.2 L2.1 U7.7 U7.9 | length 1973.6
  Top Layer w10: JP1.2@416.06,1451 427.06,1440 861.06,1440 ; U7.9 968.78,1352.28 941.06,1380 941.06,1400 901.06,1440 861.06,1440 ; U7.7 1041.06,1359.17 1041.06,1500 1021.06,1520 941.06,1520 861.06,1440
  Top Layer w50: JP1.2@416.06,1451 416.06,1065 553.62,927.44 L2.1 658.5,927.44 792.56,1061.5 C16.2
NetC20_2: C20.2 U7.2 | length 137.9
  Top Layer w10: C20.2 931.06,1140 968.78,1177.72 U7.2
NetC21_2: C21.2 R9.1 | length 75.8
  Top Layer w10: R9.1@1181.06,1096.54 1254.09,1096.54 C21.2@1256.06,1098.5
NetJP4_1: JP4.1 JP5.1 R4.2 R5.2 | length 355.2
  Top Layer w25: JP4.1 R5.2 R4.2 JP5.1
NetL1_2: L1.2 U1.2 | length 350.7
  Top Layer w10: L1.2 L1.2@757.76,2499.61
  Top Layer w12: 757.36,2273.7 757.76,2273.31 U1.2
  Top Layer w100: 757.36,2273.7 L1.2
NetLED1_2: LED1.2 R2.2 | length 155.6
  Top Layer w10: LED1.2 650,135 651.06,136.06 R2.2
NetLED2_2: LED2.2 R1.2 | length 153
  Top Layer w10: LED2.2@545,140 551.06,146.06 551.06,187.4 ; LED2.2 LED2.2@551.06,133.47 ; R1.2 551.06,187.4 ; 552.4,187.4 551.06,187.4
NetR1_1: R1.1 U3.2 | length 478.6
  Top Layer w10: R1.1 v1(551.06,405) ; U3.2 816.22,304.84 831.06,290 v1(841.06,290)
  Bottom Layer w10: v1(551.06,405) 666.06,290 v1(841.06,290)
NetR2_1: R2.1 U3.3 | length 327.2
  Top Layer w10: R2.1 v1(651.06,405) ; U3.3 835.91,335.16 v1(846.06,325) v1@851.06,325
  Bottom Layer w10: v1(651.06,405) 731.06,325 v1(846.06,325)
NetR3_2: R3.2 U3.7 | length 177.2
  Top Layer w10: U3.7 816.22,540.16 888.46,612.4 R3.2
NetR6_1: R6.1 U7.1 | length 155.1
  Top Layer w10: R6.1@851.06,1146.54 897.6,1146.54 949.09,1198.03 U7.1
NetR7_1: R7.1 R8.2 U7.3 | length 209.6
  Top Layer w10: U7.3 988.46,1167.6 1011.06,1145 R8.2 1011.06,1113.46 R7.1@1091.06,1113.46
NetR9_2: R9.2 U7.4 | length 214.2
  Top Layer w10: U7.4 1008.15,1212.91 1057.6,1163.46 R9.2@1181.06,1163.46
NetR10_2: R10.2 U7.8 | length 75.5
  Top Layer w10: U7.8 988.46,1383.94 R10.2@1001.06,1396.54
OSC1: CX1.2 OSC1.OSC1 U2.7 | length 473.7
  Top Layer w12: U2.7 1832.32,2721.26 1867.24,2756.18 OSC1.OSC1 1995.31,2756.18 CX1.2
OSC2: CX2.2 OSC1.OSC2 U2.8 | length 360.3
  Top Layer w12: CX2.2 1626.81,2653.82 OSC1.OSC2 1800.83,2581.38 U2.8
PC0: P34.0 U2.23 | length 728.9
  Top Layer w10: U2.23 1989.8,2061.26 2381.06,1670 2491.06,1670 P34.0
PC1: P35.0 U2.24 | length 656.8
  Top Layer w10: U2.24 2021.3,2069.76 2321.06,1770 2501.06,1770 P35.0
PC2: P36.0 U2.25 | length 542.7
  Top Layer w10: U2.25 2106.89,2169.76 2396.65,1880 P36.0
PC3: P37.0 U2.26 | length 514.3
  Top Layer w10: U2.26 2114.76,2201.26 2336.02,1980 P37.0
PD0: P30.0 U2.30 | length 1214.7
  Top Layer w10: U2.30 v1(2158.31,2327.24) v1@2161.06,2330 ; v1(2411.06,1630) 2551.06,1630 P30.0
  Bottom Layer w10: v1(2158.31,2327.24) 2191.06,2360 2281.06,2360 2321.06,2320 2321.06,1720 v1(2411.06,1630)
PD1: P31.0 U2.31 | length 1130.9
  Top Layer w10: U2.31 2139.8,2358.74 v1(2161.06,2380) ; v1(2411.06,1730) 2551.06,1730 P31.0
  Bottom Layer w10: v1(2161.06,2380) 2289.35,2380 2341.06,2328.28 2341.06,1800 v1(2411.06,1730)
PD2: P32.0 U2.32 | length 1076.5
  Top Layer w10: U2.32 2121.3,2390.24 v1(2161.06,2430) ; v1(2411.06,1830) 2551.06,1830 P32.0
  Bottom Layer w10: v1(2161.06,2430) 2190.3,2400.76 2297.95,2400.76 2361.06,2337.65 2361.06,1880 v1(2411.06,1830)
PD4: P33.0 U2.2 | length 1237.8
  Top Layer w10: U2.2 1989.8,2488.74 2021.06,2520 2311.06,2520 v1(2321.06,2530) ; v1(2411.06,1930) 2551.06,1930 P33.0
  Bottom Layer w10: v1(2321.06,2530) 2381.06,2470 2381.06,1960 v1(2411.06,1930)
RST: ISP1.5 U2.29 | length 1010.7
  Top Layer w10: U2.29 2186.81,2295.75 2231.06,2340 v1(2231.06,2430) ; v1(2351.06,2980) ISP1.5
  Bottom Layer w10: v1(2231.06,2430) 2231.06,2500 2351.06,2620 v1(2351.06,2980)
SCK: ISP1.3 U2.17 | length 1416.7
  Top Layer w10: U2.17 1800.83,2149.76 v1(1861.06,2210) ; v1(2261.06,2840) 2371.06,2730 2521.06,2730 2551.06,2760 2551.06,2830 ISP1.3
  Bottom Layer w10: v1(1861.06,2210) 2221.06,2570 2221.06,2800 v1(2261.06,2840) v1@2261.06,2850
SCL: P10.0 P26.0 R5.1 U2.28 | length 1190.6
  Top Layer w10: R5.1 1791.06,1943.54 1835.71,1988.19 1875.08,1988.19 v1(1924.29,2037.4) ; v1(2003.03,2244.09) 2023.19,2264.25 U2.28 2195.31,2264.25 2501.06,2570 P26.0 P10.0
  Bottom Layer w10: v1(1924.29,2037.4) 1953.82,2066.93 1953.82,2194.88 v1(2003.03,2244.09)
SDA: P8.0 P19.0 R4.1 U2.27 | length 1129.4
  Top Layer w10: R4.1 1911.06,1955.28 v1(1973.5,2017.72) ; U2.27 v1(2166.1,2232.76) 2253.82,2232.76 P19.0 P8.0
  Bottom Layer w10: v1(1973.5,2017.72) 1973.5,2165.35 2040.91,2232.76 v1(2166.1,2232.76)
SERVO1: P1.0 R12.2 U2.13 | length 2463.3
  Top Layer w10: R12.2 v1(1180,2000) ; v1(1659.02,2264.25) U2.13 ; v1(2180.2,2185.04) 2199.88,2204.72 2278.62,2204.72 2453.9,2380 P1.0
  Bottom Layer w10: v1(1180,2000) 1195,2000 1260,2065 1355,2065 1380,2090 1380,2475 1435,2530 1560,2530 1659.02,2430.98 v1(1659.02,2264.25) 1697.91,2225.35 1697.91,2096.46 1806.18,1988.19 1983.35,1988.19 v1(2180.2,2185.04)
SERVO2: P2.0 R13.2 U2.14 | length 2489.8
  Top Layer w10: R13.2 v1(1280,2000) ; v1(1658.54,2214.57) 1676.73,2232.76 U2.14 ; v1(2209.72,2155.51) 2288.46,2155.51 2465.63,2332.68 2553.74,2332.68 P2.0
  Bottom Layer w10: v1(1280,2000) 1355,2000 1405,2050 1405,2475 1435,2505 1525,2505 1625,2405 1625,2248.11 v1(1658.54,2214.57) 1668.39,2204.72 1668.39,2066.93 1766.81,1968.5 2022.72,1968.5 v1(2209.72,2155.51)
SW: P40.0 R11.1 U8.G | length 4299.9
  Top Layer w10: v1@411.06,1650 v1(413.78,1652.72) R11.1@413.78,1702.72 ; R11.1@411.06,1700 R11.1@413.78,1702.72 ; U8.G R11.1@413.78,1702.72
  Bottom Layer w10: v1(413.78,1652.72) 413.78,282.72 311.06,180 311.06,60 341.06,30 2051.06,30 2261.06,240 2261.06,420 2421.06,580 P40.0
VBAT: B1.1 B1.3 B1.5 C1.2 R11.2 U3.8 U8.S | length 6122.1
  Top Layer w10: C1.2 749.57,581.5 796.54,534.53 U3.8
  Top Layer w50: U8.S@413.78,1825 413.78,1875 413.78,1925 311.06,2027.72 ; B1.1 311.06,2849.33 311.06,2027.72 ; C1.2 701.06,670 611.06,760 461.06,760 311.06,910 311.06,2027.72
  Top Layer w100: B1.1 B1.3 B1.5
  Bottom Layer w100: B1.1 B1.3 B1.5
VBATO: C6.2 JP1.1 L1.1 U1.3 U1.7 U8.D | length 1809.5
  Top Layer w10: C6.2 663.27,2264.37 U1.3 ; v1(651.06,2090) 681.06,2120 ; 681.06,2120 705.32,2120 U1.7 681.54,2120.47 681.06,2120
  Top Layer w50: JP1.1 416.06,1575 616.06,1775 628.35,1775 628.35,1825 628.35,1875 628.35,1925 533.35,2020 481.06,2020 401.06,2100 401.06,2210 455.43,2264.37 C6.2 526.06,2481.3 L1.1
  Bottom Layer w10: v1@611.06,2270 v1(611.06,2260) 611.06,2130 v1(651.06,2090)
VM: C7.2 C9.2 JP2.2 JP3.2 U4.1 U5.1 | length 3620.4
  Top Layer w10: U5.1 2015.59,535.47 2021.06,530 ; U4.1 2060.59,910.47 2095.43,875.63 C7.2
  Top Layer w25: JP2.2 JP3.2 v2(1445.06,736) v2(1445.06,694) 1445.06,446 1601.06,290 2041.06,290 2090.43,339.37 C9.2 2090.43,460.63 2021.06,530 ; v2(2041.06,710) 2095.43,764.37 C7.2
  Bottom Layer w25: v2(1445.06,736) 1471.06,710 v2(2041.06,710)
VUSB: C2.2 J1.1 LED1.1 LED2.1 U3.1 | length 720.9
  Top Layer w12: LED2.1 LED1.1 687.6,57.6 731.06,101.06 731.06,190 813.33,272.26 813.8,272.26 ; U3.1 796.54,289.53 813.8,272.26 ; J1.1 C2.2@877.64,263.07 ; C2.2 C2.2@877.64,263.07 ; 813.8,272.26 831.06,255 869.57,255 C2.2@877.64,263.07
pads on no net: J1.2 J1.3 J1.4 U2.19 U2.22 U3.6 U6.4

## Polygon pours and split planes (outlines as drawn)
VBATO on Top Layer "Thermal" (solid, remove dead copper, pour order 5): 731.06,2210 671.06,2270 671.06,2830 381.06,2830 381.06,2210
5V on Top Layer "Thermal" (solid, remove dead copper, pour order 7): 781.06,2150 1381.06,2150 1381.06,1550 781.06,1550 461.06,1550 781.06,1870 781.06,1960
GND on Top Layer "Thermal" (solid, remove dead copper, pour order 9): 431.06,2210 731.06,2210 731.06,2150 631.06,2050 431.06,2050
GND on Top Layer "Thermal" (solid, remove dead copper, pour order 11): 981.06,1280 1351.06,1280 1371.06,1260 1371.06,860 981.06,860
9V on Top Layer "Thermal" (solid, remove dead copper, pour order 13): 1021.06,1280 1391.06,1280 1391.06,1620 1021.06,1620
NetC15_2 on Top Layer "Thermal" (solid, remove dead copper, pour order 15): 971.06,1300 931.06,1300 801.06,1430 721.06,1430 447.06,1430 441.06,1436 441.06,1430 441.06,1070 531.06,980 681.06,980 821.06,1120 821.06,1180 851.06,1180 931.06,1260 971.06,1260
GND on Top Layer "Thermal" (solid, remove dead copper, pour order 2): 1541.06,1460 2231.06,1460 2231.06,400 2231.06,270 1541.06,270
GND on Top Layer "Thermal" (solid, remove dead copper, pour order 4): 771.06,2160 1151.06,2160 1221.06,2160 1221.06,2440 1221.06,2820 1211.06,2830 771.06,2830
GND on Top Layer "Thermal" (solid, remove dead copper, pour order 17): 341.06,810 1351.06,810 1351.06,200 341.06,200
GND on Bottom Layer "GND" (solid, remove dead copper, pour order 0): 1.06,3055 2658.54,3055 2658.54,0 1.06,0

## Keep-outs
Keep-Out Layer:
  the board outline again, w10

## Silkscreen, mask and mechanical layers (free items; w line width, h text height)
Top Overlay:
  lines w10: 2271.06,2160 2261.06,2170 2261.06,2400 2271.06,2410 ; 2291.06,1230 2261.06,1260 2261.06,1500 2291.06,1530 ; 2331.06,790 2301.06,820 2301.06,1060 2331.06,1090
  text "8MHz" at 1741.06,2810 h40
  text "22p" at 1621.06,2790 h40 r90
  text "22p" at 2031.06,2790 h40 r90
  text "100u" at 2131.06,2790 h40 r90
  text "100u" at 2231.06,2790 h40 r90
  text "XAL 1uH" at 521.06,2680 h40
  text "I2C" at 2261.06,2480 h40 r90
  text "MIC550x" at 1351.06,2420 h40 r90
  text "10u" at 1191.06,2410 h40 r90
  text "10u" at 1441.06,2410 h40 r90
  text "SV12" at 2281.06,2360 h40
  text "SERVO" at 2241.06,2200 h40 r90
  text "10u" at 471.06,2180 h40 r90
  text "5vM" at 1351.06,2160 h40
  text "ATMEGA328P" at 1599.49,2106.3 h40 r90
  text "TPS61235P" at 401.06,2030 h40 r90
  text "22u" at 911.06,1950 h40 r90
  text "22u" at 1000,1950 h40 r90
  text "22u" at 1090,1950 h40 r90
  text "4k7" at 1871.06,1820 h40 r90
  text "4k7" at 1991.06,1820 h40 r90
  text "GPIO" at 2071.06,1770 h40 r90
  text "9V EN to enable 9V supply / xVM for motor supply voltage / I2C PUP for I2C pullup / ATMEGA328P micro" at 339.65,1722.44 h40 r90
  text "I2C PUP" at 1711.06,1640 h40 r90
  text "A" at 2481.06,1550 h50
  text "B" at 2581.06,1550 h50
  text "5v" at 1811.06,1529.99 h40 r90
  text "130K" at 1021.06,1510 h40 r90
  text "3v3" at 1931.06,1490 h40 r90
  text "SLP" at 2291.06,1460 h50
  text "100u" at 871.06,1420 h40 r90
  text "9V EN" at 511.06,1410 h40 r90
  text "9vM" at 1351.06,1390 h40
  text "22u" at 1121.06,1360 h40 r90
  text "22u" at 1211.06,1360 h40 r90
  text "22u" at 1301.06,1360 h40 r90
  text "IN1" at 2291.06,1360 h50
  text "CAR REAR" at 80,1330 h40 r90
  text "CDMC 1.8uH" at 411.06,1310 h40
  text "BYPASS" at 2231.06,1260 h40 r90
  text "IN2" at 2291.06,1260 h50
  text "300K" at 811.06,1110 h40 r90
  text "DRV8837" at 1790,1040 h40
  text "22u" at 811.06,970 h40 r90
  text "18K" at 1201.06,950 h40 r90
  text "4n7" at 1271.06,950 h40 r90
  text "TPS61089x" at 398.7,905.51 h40 r90
  text "2u2" at 951.06,889.99 h40 r90
  text "110K" at 1031.06,863.33 h40 r90
  text "100u" at 1721.06,860 h40
  text "100u" at 2001.06,860 h40
  text "680K" at 1111.06,850 h40 r90
  text "MOTOR" at 2261.06,850 h40 r90
  text "4k7" at 801.06,680 h40
  text "DRV8837" at 1720,670 h40
  text "2u2" at 721.06,640 h40 r90
  text "SW" at 2310,550 h50
  text "100u" at 1711.06,460 h40
  text "100u" at 1991.06,460 h40
  text "1K" at 571.06,450 h40 r90
  text "1K" at 671.06,450 h40 r90
  text "MC34673" at 491.06,340 h40 r90
  text "1u" at 901.06,330 h40
  text "GREEN" at 411.06,180 h40 r90
  text "RED" at 481.06,180 h40 r90
  text "SUPPLY" at 2241.06,110 h40 r90
  text "Denny Zhang 2017 / Pathfinder Project HW2 / 18650 Supply+Motor/Servo Driver" at 260.91,29.53 h40 r90
Bottom Overlay:
  text "BK18650-6P" at 1360,305 h40